# EAGLE board Titan_6L_EoB_v1p5 (EAGLE 9.6.2), part 1 of 2
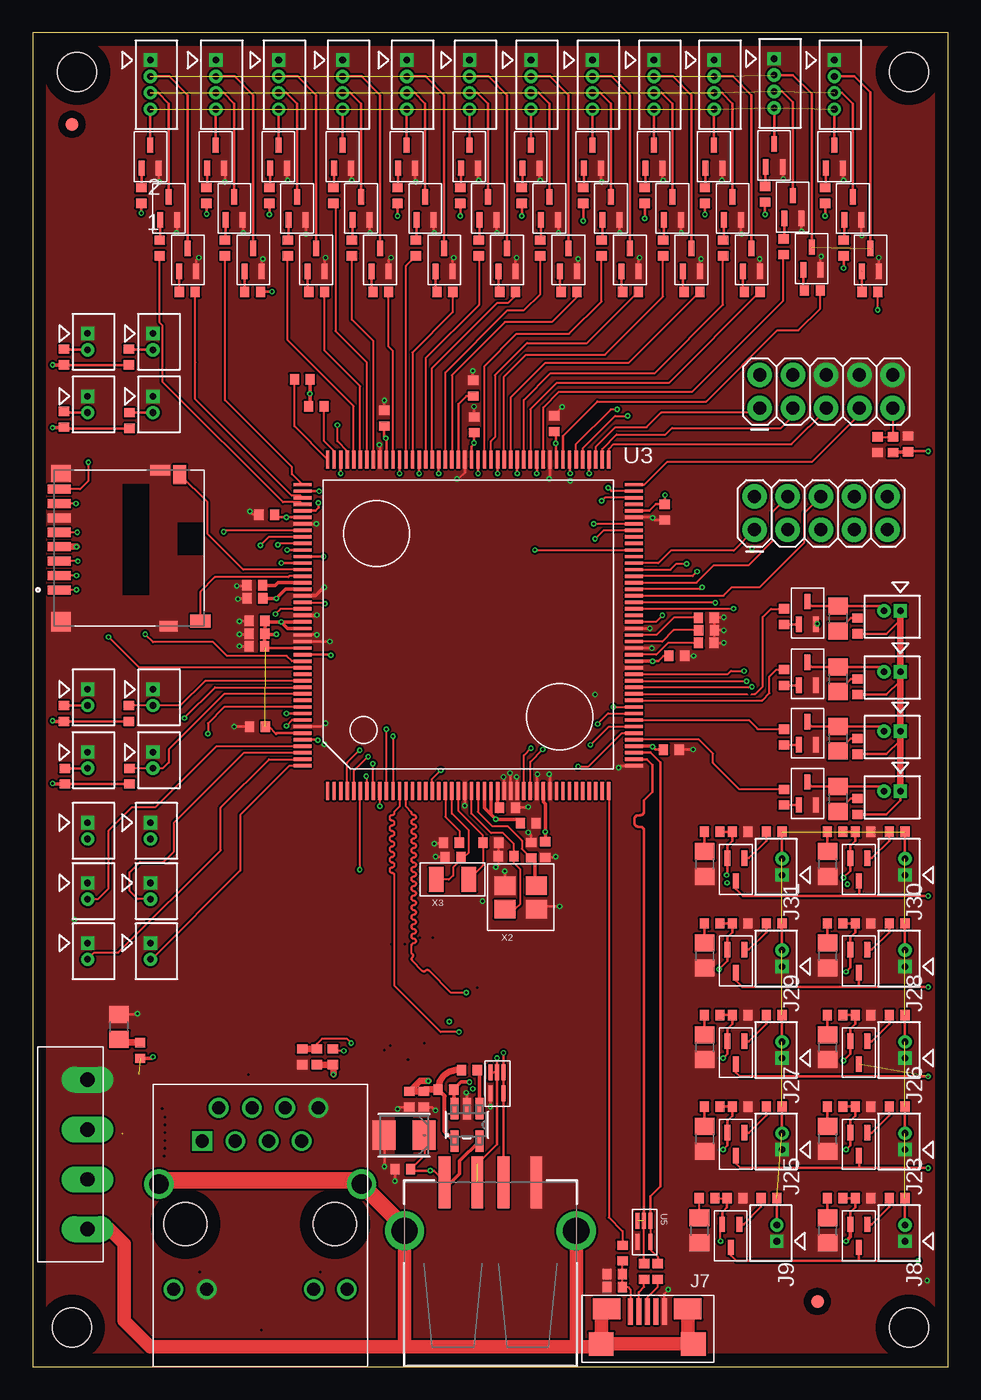
[diagram p0: board, top side]
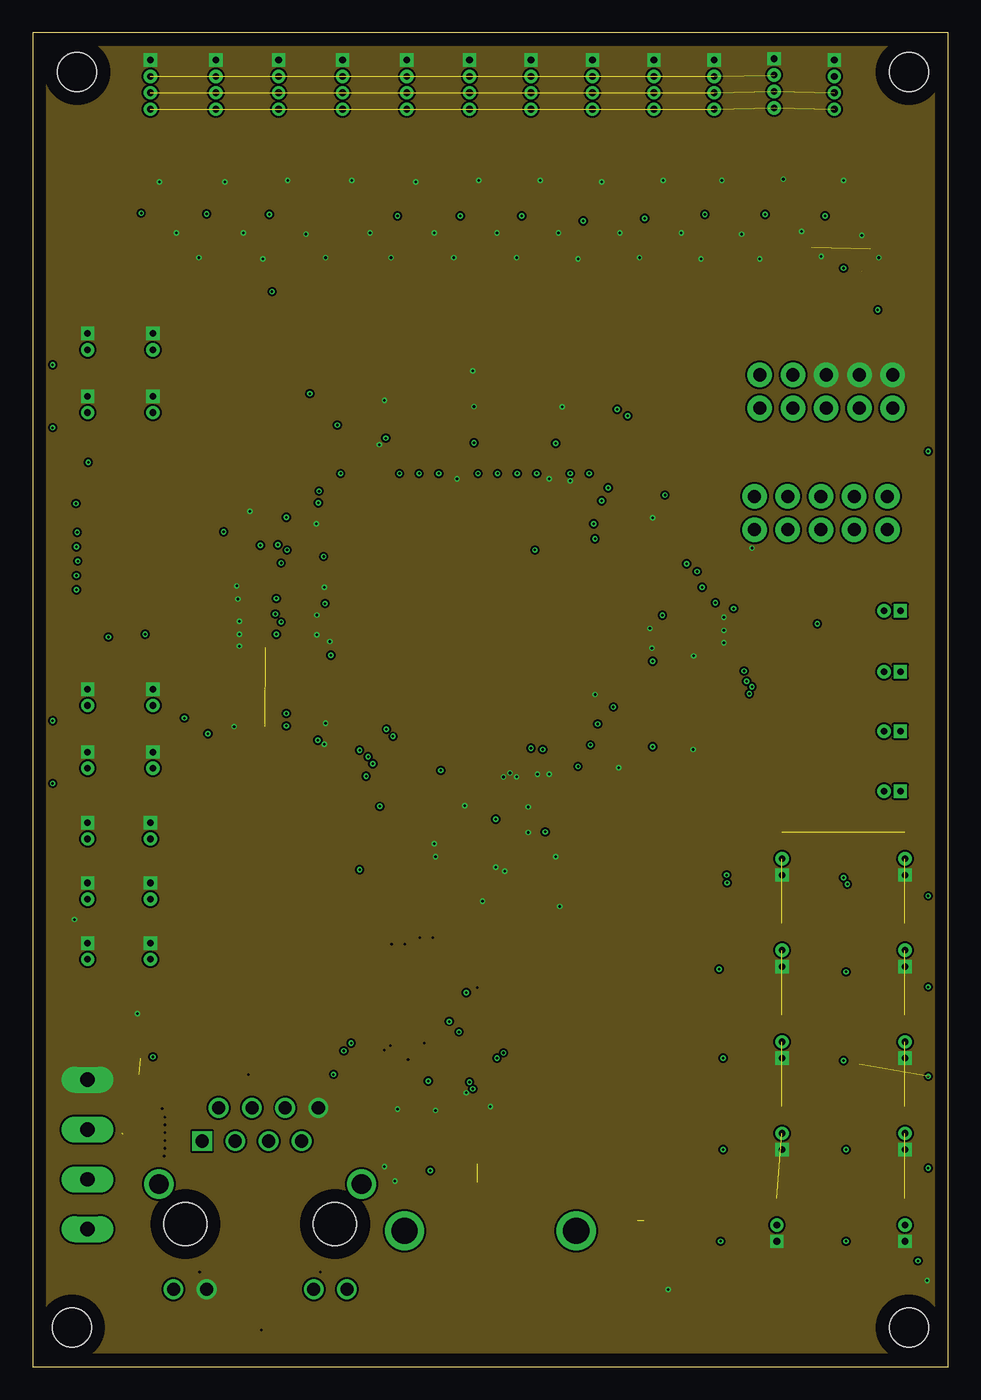
[diagram p1: board, inner layer GND]
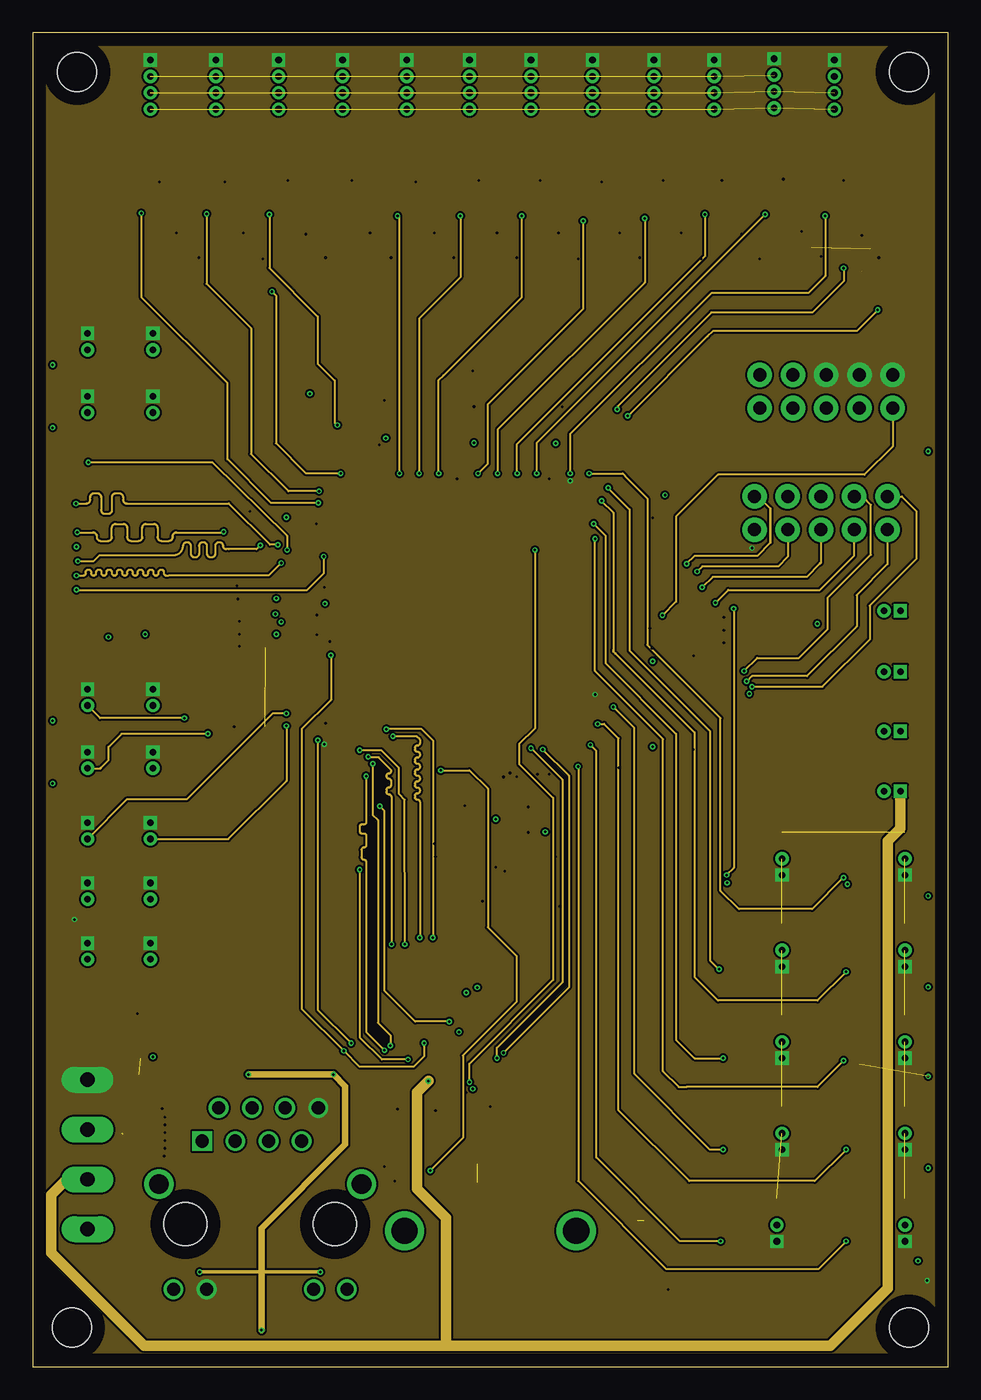
[diagram p2: board, inner layer Route3]
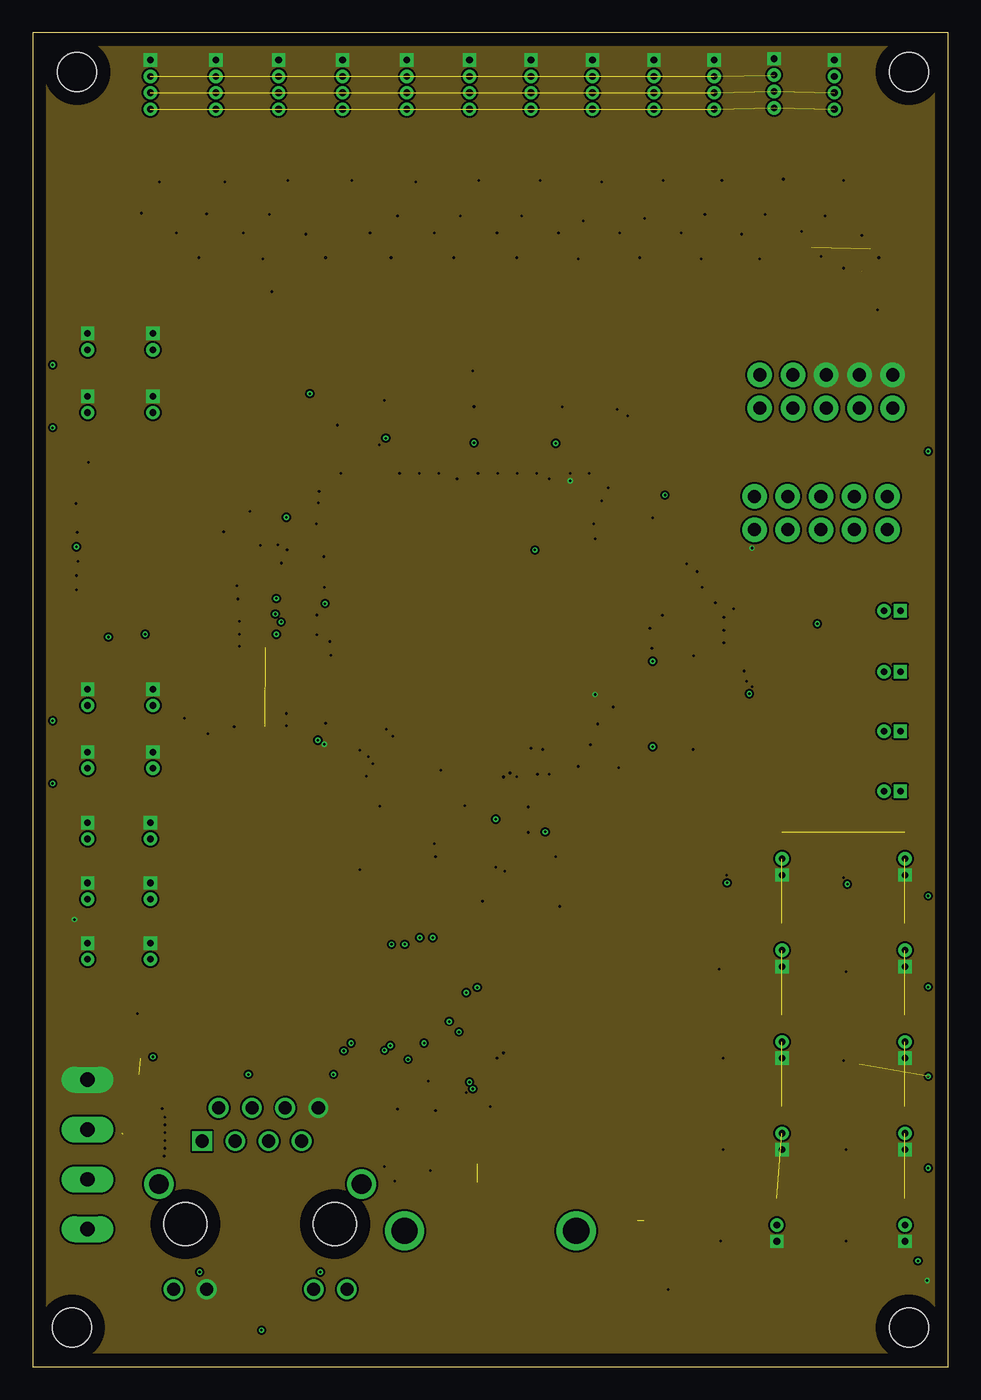
[diagram p3: board, inner layer GND14]
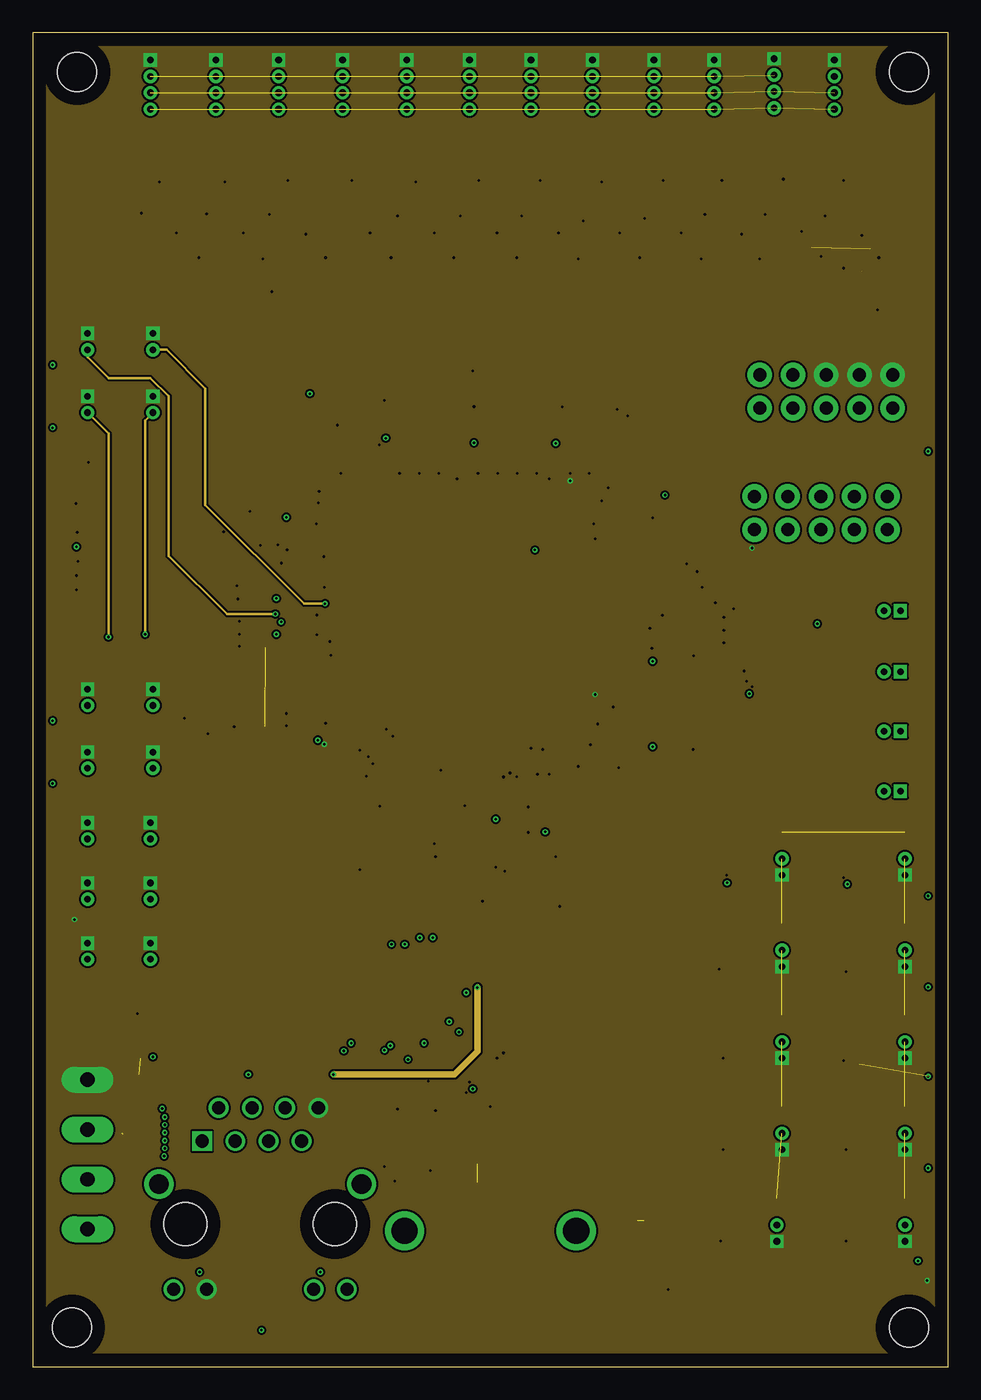
[diagram p4: board, inner layer Route15]
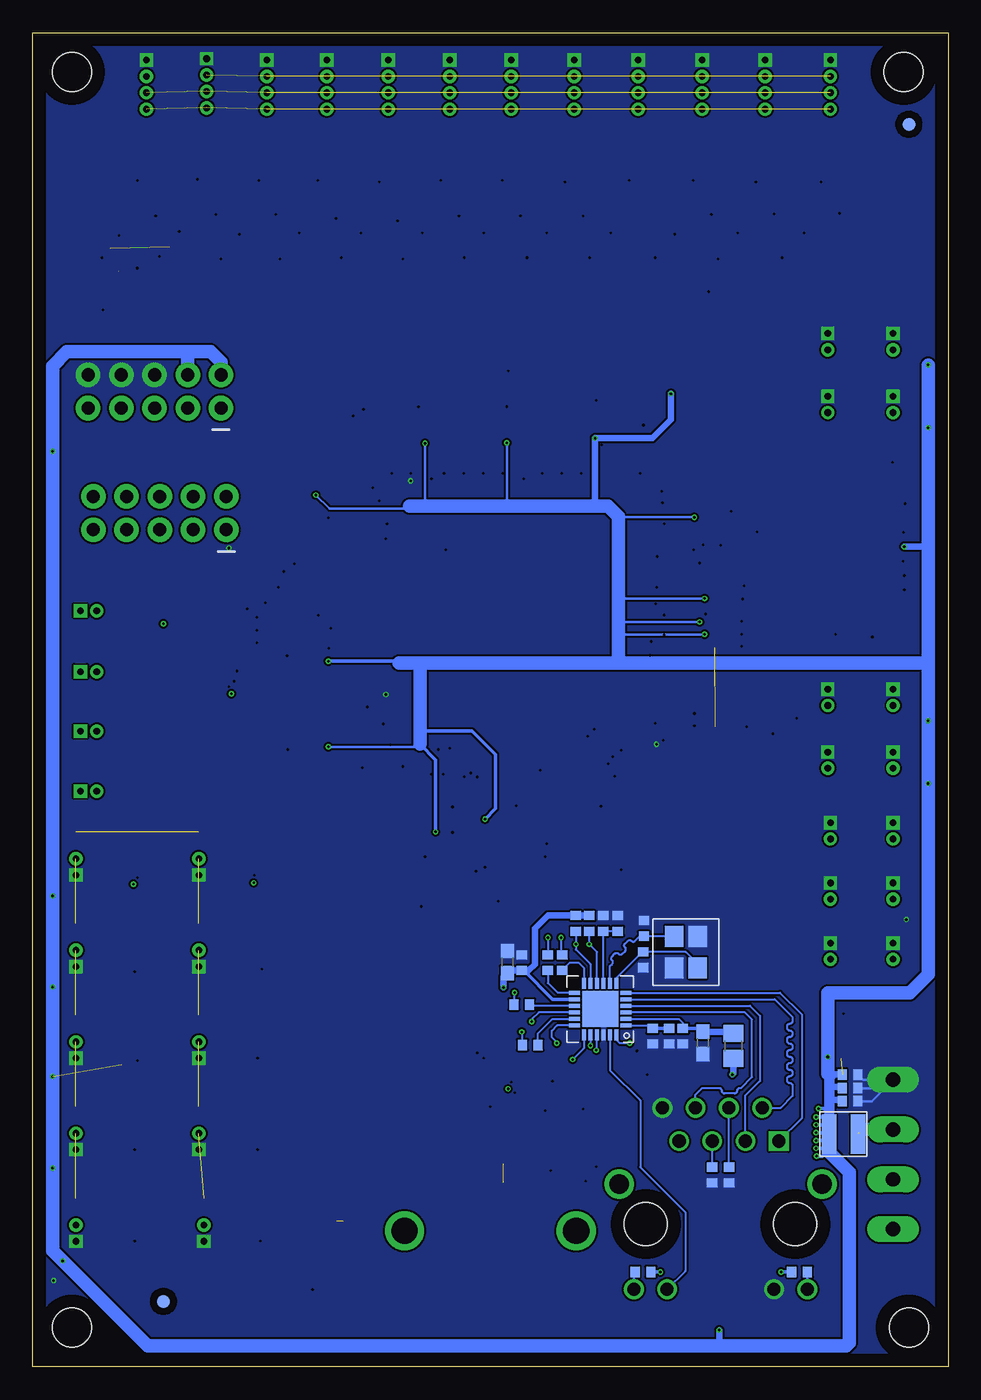
[diagram p5: board, bottom side, seen from below]

Size 70 x 102 mm. Coordinates in mm from the lower left corner, seen from the top.
Outline: 0,0 70,0 70,102 0,102 0,0
Copper layers ([3:[2:[15:1+2*3+14*15+16:2]:15]]): Top 0.0348mm / dielectric 0.1mm / GND 0.0348mm / dielectric 0.546mm / Route3 0.0348mm / dielectric 0.1mm / GND14 0.0348mm / dielectric 0.546mm / Route15 0.0348mm / dielectric 0.1mm / Bottom 0.0348mm
Design rules "default *": minimum track width 0.15mm, minimum drill 0.2mm, track to track 6mil, track to pad 6mil, pad to pad 6mil, via to via 6mil, smd to smd 6mil, copper to edge 40mil, drill to drill 6mil, minimum pad ring 10mil, minimum via ring 4mil, stop-mask expansion 4mil, vias tented up to drill 0mil, thermal gap 10mil
Holes 3 mm at 3.4,99 67,99 67,3 3,3

## Footprints (pad centres in the part's own frame; a part is rotated, then mirrored left to right if it is on the bottom)
FIDUCIAL_1MM = smd 1 x 1: 1 0,0
CAP_1210TJLJ_3P5X2P8_DIO-M = smd 1.753 x 2.261: 1 -1.537,0; 2 1.537,0
0402 = smd 0.8 x 0.7: P$1 0,0.6; P$2 0,-0.6
0603 = smd 1.1 x 1: 1 -0.85,0; 2 0.85,0
0805 = smd 1.3 x 1.5: 1 -0.95,0; 2 0.95,0
SD_CARD = smd 0.7 x 1.75: 1 3.2,-5.285; 2 2.1,-5.285; 3 1,-5.285; 4 -0.1,-5.285; 5 -1.2,-5.285; 6 -2.3,-5.285; 7 -3.4,-5.285; 8 -4.5,-5.285 | smd 1 x 1.55: 9 5.575,5.515 | smd 1.45 x 1: 10 -5.625,3.94 | smd 1.5 x 1.5: S1 5.65,-5.16 | smd 1.3 x 1.5: S2 -5.7,-5.16 | smd 0.8 x 1.4: S3 5.975,3.09 | smd 0.8 x 1.5: S4 -5.95,2.44
1X4_3.81MM_PITCH = drill 1.1 pad 2 long: P$1 0,0; P$2 3.81,0; P$3 7.62,0; P$4 11.43,0
2X5 = drill 1 pad 1.88: 1 0,0; 2 0,2.54; 3 2.54,0; 4 2.54,2.54; 5 5.08,0; 6 5.08,2.54; 7 7.62,0; 8 7.62,2.54; 9 10.16,0; 10 10.16,2.54
CON_530470210_MOL = drill 0.508 pad 0.838 square: 1 0,0 | drill 0.508 pad 0.838: 2 -1.245,0
USB_A_SMT = smd 4 x 0.9: D+ 6.7,-1; D- 6.7,1; GND 6.7,-3.5; VBUS 6.7,3.5 | drill 2: SHLD1 3,-6.566; SHLD2 3,6.566
USB_MICRO-B = smd 0.4 x 2: P$1 -1.3,2.475; P$2 -0.65,2.475; P$3 0,2.475; P$4 0.65,2.475; P$5 1.3,2.475 | smd 2.1 x 1.6: P$6 -3.1,2.675; P$7 3.1,2.675 | smd 1.9 x 1.8: P$8 -3.525,0; P$9 3.525,0
CON_530470410_MOL = drill 0.508 pad 0.838 square: 1 0,0 | drill 0.508 pad 0.838: 2 -1.245,0; 3 -2.489,0; 4 -3.759,0
1008 = smd 3 x 1.1: 1 0,1.1; 2 0,-1.1
SOT-23-5 = smd 1.626 x 0.61: 1 -1.245,0.95; 2 -1.245,0; 3 -1.245,-0.95; 4 1.245,-0.95; 5 1.245,0.95
LQFP176_24X24 = smd 1.372 x 0.254: 1 -12.675,10.75; 2 -12.675,10.25; 3 -12.675,9.75; 4 -12.675,9.25; 5 -12.675,8.75; 6 -12.675,8.25; 7 -12.675,7.75; 8 -12.675,7.25; 9 -12.675,6.75; 10 -12.675,6.25; 11 -12.675,5.75; 12 -12.675,5.25; 13 -12.675,4.75; 14 -12.675,4.25; 15 -12.675,3.75; 16 -12.675,3.25; 17 -12.675,2.75; 18 -12.675,2.25; 19 -12.675,1.75; 20 -12.675,1.25; 21 -12.675,0.75; 22 -12.675,0.25; 23 -12.675,-0.25; 24 -12.675,-0.75; 25 -12.675,-1.25; 26 -12.675,-1.75; 27 -12.675,-2.25; 28 -12.675,-2.75; 29 -12.675,-3.25; 30 -12.675,-3.75; 31 -12.675,-4.25; 32 -12.675,-4.75; 33 -12.675,-5.25; 34 -12.675,-5.75; 35 -12.675,-6.25; 36 -12.675,-6.75; 37 -12.675,-7.25; 38 -12.675,-7.75; 39 -12.675,-8.25; 40 -12.675,-8.75; 41 -12.675,-9.25; 42 -12.675,-9.75; 43 -12.675,-10.25; 44 -12.675,-10.75; 89 12.675,-10.75; 90 12.675,-10.25; 91 12.675,-9.75; 92 12.675,-9.25; 93 12.675,-8.75; 94 12.675,-8.25; 95 12.675,-7.75; 96 12.675,-7.25; 97 12.675,-6.75; 98 12.675,-6.25; 99 12.675,-5.75; 100 12.675,-5.25; 101 12.675,-4.75; 102 12.675,-4.25; 103 12.675,-3.75; 104 12.675,-3.25; 105 12.675,-2.75; 106 12.675,-2.25; 107 12.675,-1.75; 108 12.675,-1.25; 109 12.675,-0.75; 110 12.675,-0.25; 111 12.675,0.25; 112 12.675,0.75; 113 12.675,1.25; 114 12.675,1.75; 115 12.675,2.25; 116 12.675,2.75; 117 12.675,3.25; 118 12.675,3.75; 119 12.675,4.25; 120 12.675,4.75; 121 12.675,5.25; 122 12.675,5.75; 123 12.675,6.25; 124 12.675,6.75; 125 12.675,7.25; 126 12.675,7.75; 127 12.675,8.25; 128 12.675,8.75; 129 12.675,9.25; 130 12.675,9.75; 131 12.675,10.25; 132 12.675,10.75 | smd 0.254 x 1.372: 45 -10.75,-12.675; 46 -10.25,-12.675; 47 -9.75,-12.675; 48 -9.25,-12.675; 49 -8.75,-12.675; 50 -8.25,-12.675; 51 -7.75,-12.675; 52 -7.25,-12.675; 53 -6.75,-12.675; 54 -6.25,-12.675; 55 -5.75,-12.675; 56 -5.25,-12.675; 57 -4.75,-12.675; 58 -4.25,-12.675; 59 -3.75,-12.675; 60 -3.25,-12.675; 61 -2.75,-12.675; 62 -2.25,-12.675; 63 -1.75,-12.675; 64 -1.25,-12.675; 65 -0.75,-12.675; 66 -0.25,-12.675; 67 0.25,-12.675; 68 0.75,-12.675; 69 1.25,-12.675; 70 1.75,-12.675; 71 2.25,-12.675; 72 2.75,-12.675; 73 3.25,-12.675; 74 3.75,-12.675; 75 4.25,-12.675; 76 4.75,-12.675; 77 5.25,-12.675; 78 5.75,-12.675; 79 6.25,-12.675; 80 6.75,-12.675; 81 7.25,-12.675; 82 7.75,-12.675; 83 8.25,-12.675; 84 8.75,-12.675; 85 9.25,-12.675; 86 9.75,-12.675; 87 10.25,-12.675; 88 10.75,-12.675; 133 10.75,12.675; 134 10.25,12.675; 135 9.75,12.675; 136 9.25,12.675; 137 8.75,12.675; 138 8.25,12.675; 139 7.75,12.675; 140 7.25,12.675; 141 6.75,12.675; 142 6.25,12.675; 143 5.75,12.675; 144 5.25,12.675; 145 4.75,12.675; 146 4.25,12.675; 147 3.75,12.675; 148 3.25,12.675; 149 2.75,12.675; 150 2.25,12.675; 151 1.75,12.675; 152 1.25,12.675; 153 0.75,12.675; 154 0.25,12.675; 155 -0.25,12.675; 156 -0.75,12.675; 157 -1.25,12.675; 158 -1.75,12.675; 159 -2.25,12.675; 160 -2.75,12.675; 161 -3.25,12.675; 162 -3.75,12.675; 163 -4.25,12.675; 164 -4.75,12.675; 165 -5.25,12.675; 166 -5.75,12.675; 167 -6.25,12.675; 168 -6.75,12.675; 169 -7.25,12.675; 170 -7.75,12.675; 171 -8.25,12.675; 172 -8.75,12.675; 173 -9.25,12.675; 174 -9.75,12.675; 175 -10.25,12.675; 176 -10.75,12.675
DRL5 = smd 1.219 x 0.305: 1 -0.8,0.5; 2 -0.8,0; 3 -0.8,-0.5; 4 0.8,-0.5; 5 0.8,0.5
QFN-24-M = smd 0.864 x 0.305: 1 -1.968,1.25; 2 -1.968,0.75; 3 -1.968,0.25; 4 -1.968,-0.25; 5 -1.968,-0.75; 6 -1.968,-1.25; 13 1.968,-1.25; 14 1.968,-0.75; 15 1.968,-0.25; 16 1.968,0.25; 17 1.968,0.75; 18 1.968,1.25 | smd 0.305 x 0.864: 7 -1.25,-1.968; 8 -0.75,-1.968; 9 -0.25,-1.968; 10 0.25,-1.968; 11 0.75,-1.968; 12 1.25,-1.968; 19 1.25,1.968; 20 0.75,1.968; 21 0.25,1.968; 22 -0.25,1.968; 23 -0.75,1.968; 24 -1.25,1.968 | smd 2.743 x 2.743: 25 0,0
SOT323 = smd 0.457 x 1.168: 1 -0.65,-0.876; 2 0.65,-0.876; 3 0,0.876
RJ45_TH_ELEC = drill 1 square: 1 -4.45,-2.54 | drill 1: 2 -3.18,0; 3 -1.91,-2.54; 4 -0.635,0; 5 0.635,-2.54; 6 1.91,0; 7 3.17,-2.54; 8 4.445,0; 9 -6.63,-13.88; 10 -4.09,-13.88; 11 4.09,-13.88; 12 6.63,-13.88 | drill 1.5: 13 -7.75,-5.84; 14 7.75,-5.84 | hole 3.299: 5.715,-8.89; -5.715,-8.89
SMD_3225 = smd 1.6 x 1.4: 1 -1.2,-0.9; 2 1.2,-0.9; 3 1.2,0.9; 4 -1.2,0.9
SMD_X_2_PADS = smd 1.9 x 1.1: P$1 0,1.25; P$2 0,-1.25

## Placement (x,y rotation side)
AFID1  FIDUCIAL_1MM  [FIDUCIAL_1MM]  60,5 0 top
AFID2  FIDUCIAL_1MM  [FIDUCIAL_1MM]  3,95 0 top
AFID4  FIDUCIAL_1MM  [FIDUCIAL_1MM]  60,5 0 bottom
AFID5  FIDUCIAL_1MM  [FIDUCIAL_1MM]  3,95 0 bottom
C1  TLJT107M010R0900CAP_1210TJLJ_3P5X2P8_DIO-M  [CAP_1210TJLJ_3P5X2P8_DIO-M]  28.4,17.7 180 top
C4  0.1uF  [0402]  7.5,22.35 90 bottom
C5  10uF  [0402]  7.5,21.3 90 bottom
C6  0.1uF  [0402]  49.25,54.35 90 top
C7  0.1uF  [0402]  7.5,20.3 90 bottom
C15  0.1uF  [0402]  16.76,14.67 0 bottom
C16  10uF  [0402]  64.62,70.5 0 top
C17  18pF  [0402]  36.2,39.03 270 top
C18  18pF  [0402]  38.13,39.5 180 top
C19  0.1uF  [0402]  17,58.75 90 top
C20  0.1uF  [0402]  17.89,65.15 90 top
C21  1uF  [0402]  17.16,56.05 90 top
C22  0.1uF  [0402]  17.15,57.05 90 top
C23  10uF  [0402]  29.9,20.45 0 top
C24  0.1uF  [0402]  16.98,59.74 90 top
C25  0.1uF  [0402]  17.14,55.08 90 top
C26  0.1uF  [0402]  28.8,20.45 0 top
C27  0.1uF  [0402]  17.19,48.95 90 top
C28  1uF  [0402]  44.5,7.1 270 top
C29  0.1uF  [0402]  28.3,15.1 270 top
C30  0.1uF  [0402]  26.87,72.52 0 top
C31  0.1uF  [0402]  18.04,14.67 0 bottom
C32  12pF  [0402]  32.14,38.97 270 top
C33  0.1uF  [0402]  32.02,40.07 270 top
C34  0.1uF  [0402]  33.69,74.82 0 top
C35  0.1uF  [0402]  33.75,72.02 0 top
C36  0.1uF  [0402]  37.89,41.56 90 top
C37  12pF  [0402]  35.03,40.07 90 top
C38  0.1uF  [0402]  39.89,72.11 0 top
C39  0.1uF  [0402]  39.19,39.55 0 top
C40  0.1uF  [0402]  66.94,70.55 180 top
C41  1uF  [0402]  48.34,65.34 0 top
C42  0.1uF  [0402]  51.5,55.35 90 top
C43  0.1uF  [0402]  48.84,47.19 270 top
C44  24pF  [0402]  23.31,31.12 0 bottom
C45  24pF  [0402]  23.26,33.53 180 bottom
C46  22uF  [0603]  18.76,24.76 270 bottom
C47  0.1uF  [0402]  20.29,25.28 0 bottom
C48  2.2uF  [0402]  21.32,25.28 0 bottom
C49  .1uF  [0402]  22.6,25.28 0 bottom
C50  100pF  [0402]  26.36,33.9 180 bottom
C51  22uF  [0603]  33.7,30.95 90 bottom
C52  0.1uF  [0402]  32.6,30.9 180 bottom
FB2/2  [0805]  16.42,24.53 90 bottom
J1  SD_CARD  [SD_CARD]  7.31,62.6 270 top
J2  4-pos  [1X4_3.81MM_PITCH]  4.2,21.95 270 top
J3  10-pos  [2X5]  55.6,73.3 0 top
J4  [CON_530470210_MOL]  4.2,37 90 top
J5  [CON_530470210_MOL]  9,37 90 top
J6  USB-A  [USB_A_SMT]  35,7.4 90 top
J7  USB-B-Micro  [USB_MICRO-B]  47,1.75 0 top
J8  [CON_530470210_MOL]  66.7,9.6 270 top
J9  [CON_530470210_MOL]  56.9,9.6 270 top
J10  CONN_530470410_PICOBLADE_X_4  [CON_530470410_MOL]  9,99.91 90 top
J11  [CON_530470210_MOL]  66.35,44 0 top
J12  10-pos  [2X5]  55.2,64 0 top
J13  CONN_530470410_PICOBLADE_X_4  [CON_530470410_MOL]  14,99.91 90 top
J14  CONN_530470410_PICOBLADE_X_4  [CON_530470410_MOL]  18.8,99.91 90 top
J15  CONN_530470410_PICOBLADE_X_4  [CON_530470410_MOL]  23.7,99.91 90 top
J16  CONN_530470410_PICOBLADE_X_4  [CON_530470410_MOL]  28.6,99.91 90 top
J17  CONN_530470410_PICOBLADE_X_4  [CON_530470410_MOL]  47.5,99.91 90 top
J18  CONN_530470410_PICOBLADE_X_4  [CON_530470410_MOL]  33.4,99.91 90 top
J19  CONN_530470410_PICOBLADE_X_4  [CON_530470410_MOL]  61.3,99.91 90 top
J20  CONN_530470410_PICOBLADE_X_4  [CON_530470410_MOL]  38.1,99.91 90 top
J21  CONN_530470410_PICOBLADE_X_4  [CON_530470410_MOL]  52.1,99.91 90 top
J22  CONN_530470410_PICOBLADE_X_4  [CON_530470410_MOL]  42.8,99.91 90 top
J23  [CON_530470210_MOL]  66.7,16.6 270 top
J24  CONN_530470410_PICOBLADE_X_4  [CON_530470410_MOL]  56.7,100.01 90 top
J25  [CON_530470210_MOL]  57.3,16.6 270 top
J26  [CON_530470210_MOL]  66.7,23.6 270 top
J27  [CON_530470210_MOL]  57.3,23.6 270 top
J28  [CON_530470210_MOL]  66.7,30.6 270 top
J29  [CON_530470210_MOL]  57.3,30.6 270 top
J30  [CON_530470210_MOL]  66.7,37.6 270 top
J31  [CON_530470210_MOL]  57.3,37.6 270 top
J32  [CON_530470210_MOL]  66.35,48.6 0 top
J33  [CON_530470210_MOL]  66.35,53.15 0 top
J34  [CON_530470210_MOL]  66.35,57.8 0 top
J35  [CON_530470210_MOL]  4.2,41.6 90 top
J36  [CON_530470210_MOL]  4.2,32.4 90 top
J37  [CON_530470210_MOL]  9,32.4 90 top
J38  [CON_530470210_MOL]  9,41.6 90 top
L1  2.2uH  [1008]  8,17.8 270 bottom
LED1  Green  [0805]  6.6,26 90 top
LED3  Green  [0805]  60.78,10.44 270 top
LED4  Green  [0805]  50.98,10.44 270 top
LED5  Green  [0805]  61.58,43.42 90 top
LED6  Green  [0805]  60.78,17.44 270 top
LED7  Green  [0805]  51.38,17.44 270 top
LED8  Green  [0805]  60.78,24.44 270 top
LED9  Green  [0805]  51.38,24.44 270 top
LED10  Green  [0805]  60.78,31.44 270 top
LED11  Green  [0805]  51.38,31.44 270 top
LED12  Green  [0805]  60.78,38.44 270 top
LED13  Green  [0805]  51.38,38.44 270 top
LED14  Green  [0805]  61.58,48.02 90 top
LED15  Green  [0805]  61.58,52.57 90 top
LED16  Green  [0805]  61.58,57.22 90 top
R1  100K  [0402]  2.45,45.15 0 top
R2  100K  [0402]  7.4,45.15 0 top
R3  500R0  [0402]  57.45,43.55 0 top
R4  2.2K  [0402]  66.1,12.9 270 top
R5  470R0  [0402]  8.22,24.19 0 top
R6  470R0  [0402]  61.36,12.9 90 top
R7  10K0  [0402]  63.5,12.9 270 top
R8  2.2K  [0402]  56.3,12.9 270 top
R9  470R0  [0402]  51.56,12.9 90 top
R10  10K0  [0402]  53.7,12.9 270 top
R11  470R0  [0402]  63.06,42.84 0 top
R12  500R0  [0402]  57.45,48.15 0 top
R13  10K0  [0402]  65.77,70.5 0 top
R14  1K0  [0402]  20.62,75.5 270 top
R15  1K0  [0402]  21.68,73.43 90 top
R16  15K0  [0402]  45.1,8.7 0 top
R17  27R0  [0402]  46.75,7.3 0 top
R18  27R0  [0402]  47.8,7.3 0 top
R19  10K0  [0402]  31.6,21.2 270 top
R20  10K0  [0402]  33.4,22.7 270 top
R21  30K0  [0402]  44.5,6.1 90 top
R22  2K2  [0402]  36.31,42.75 270 top
R23  10K0  [0402]  51.52,56.32 270 top
R24  10K0  [0402]  51.51,57.28 270 top
R27  470R0  [0402]  63.06,47.44 0 top
R28  33R0  [0402]  8.3,89.55 180 top
R29  33R0  [0402]  9.71,85.53 180 top
R30  33R0  [0402]  11.82,82.2 270 top
R31  33R0  [0402]  13.3,89.55 180 top
R32  33R0  [0402]  14.71,85.53 180 top
R33  33R0  [0402]  16.82,82.2 270 top
R34  33R0  [0402]  18.1,89.55 180 top
R35  33R0  [0402]  19.51,85.53 180 top
R36  33R0  [0402]  21.72,82.2 270 top
R37  33R0  [0402]  23,89.55 180 top
R38  33R0  [0402]  24.41,85.53 180 top
R39  33R0  [0402]  26.62,82.2 270 top
R40  33R0  [0402]  27.9,89.55 180 top
R41  33R0  [0402]  29.31,85.53 180 top
R42  33R0  [0402]  31.52,82.2 270 top
R43  33R0  [0402]  46.8,89.55 180 top
R44  33R0  [0402]  48.21,85.53 180 top
R45  33R0  [0402]  50.42,82.2 270 top
R46  33R0  [0402]  32.7,89.55 180 top
R47  33R0  [0402]  34.11,85.53 180 top
R48  33R0  [0402]  36.32,82.2 270 top
R49  33R0  [0402]  60.6,89.55 180 top
R50  33R0  [0402]  62.01,85.53 180 top
R51  33R0  [0402]  64.02,82.2 270 top
R52  33R0  [0402]  37.4,89.55 180 top
R53  33R0  [0402]  38.81,85.53 180 top
R54  33R0  [0402]  41.02,82.2 270 top
R55  33R0  [0402]  51.4,89.55 180 top
R56  33R0  [0402]  52.81,85.53 180 top
R57  33R0  [0402]  55.02,82.2 270 top
R58  33R0  [0402]  42.1,89.55 180 top
R59  33R0  [0402]  43.51,85.53 180 top
R60  33R0  [0402]  45.72,82.2 270 top
R61  2.2K  [0402]  66.1,19.9 270 top
R62  470R0  [0402]  61.36,19.9 90 top
R63  10K0  [0402]  63.5,19.9 270 top
R64  33R0  [0402]  56,89.65 180 top
R65  33R0  [0402]  57.41,85.63 180 top
R66  33R0  [0402]  59.62,82.3 270 top
R67  2.2K  [0402]  56.7,19.9 270 top
R68  470R0  [0402]  51.96,19.9 90 top
R69  10K0  [0402]  54.1,19.9 270 top
R70  2.2K  [0402]  66.1,26.9 270 top
R71  470R0  [0402]  61.36,26.9 90 top
R72  10K0  [0402]  63.5,26.9 270 top
R73  2.2K  [0402]  56.7,26.9 270 top
R76  470R0  [0402]  51.96,26.9 90 top
R77  10K0  [0402]  54.1,26.9 270 top
R78  2.2K  [0402]  66.1,33.9 270 top
R79  470R0  [0402]  61.36,33.9 90 top
R80  10K0  [0402]  63.5,33.9 270 top
R81  2.2K  [0402]  56.7,33.9 270 top
R82  470R0  [0402]  51.96,33.9 90 top
R83  10K0  [0402]  54.1,33.9 270 top
R84  2.2K  [0402]  66.1,40.9 270 top
R85  470R0  [0402]  61.36,40.9 90 top
R86  10K0  [0402]  63.5,40.9 270 top
R88  2.2K  [0402]  56.7,40.9 270 top
R89  470R0  [0402]  51.96,40.9 90 top
R90  10K0  [0402]  54.1,40.9 270 top
R91  500R0  [0402]  57.45,52.7 0 top
R92  470R0  [0402]  63.06,51.99 0 top
R93  500R0  [0402]  57.45,57.35 0 top
R95  470R0  [0402]  63.06,56.64 0 top
R96  100K  [0402]  2.4,77.2 0 top
R97  100K  [0402]  7.35,77.2 0 top
R102  100K  [0402]  2.4,49.95 0 top
R103  100K  [0402]  7.35,49.95 0 top
R105  100K  [0402]  2.4,72.45 0 top
R106  100K  [0402]  7.4,72.35 0 top
R107  470  [0402]  23.33,7.25 90 bottom
R108  470  [0402]  11.37,7.25 270 bottom
R109  6k49  [0402]  25.26,33.9 0 bottom
R110  10K  [0402]  22.96,23.7 0 top
R111  10K  [0402]  21.74,23.7 0 top
R112  1K50  [0402]  28.46,33.9 180 bottom
R113  1K50  [0402]  27.44,33.9 180 bottom
R114  33  [0402]  29.5,30.9 0 bottom
R115  33  [0402]  30.6,30.9 0 bottom
R116  33  [0402]  31.95,24.6 90 bottom
R117  33  [0402]  32.6,27.7 90 bottom
TH01  [CON_530470210_MOL]  4.2,47 90 top
TH02  [CON_530470210_MOL]  9.2,47 90 top
TH03  [CON_530470210_MOL]  4.2,51.8 90 top
TH04  [CON_530470210_MOL]  9.2,51.8 90 top
TH05  [CON_530470210_MOL]  4.2,74.2 90 top
TH06  [CON_530470210_MOL]  9.2,74.2 90 top
TH07  [CON_530470210_MOL]  4.2,79 90 top
TH08  [CON_530470210_MOL]  9.2,79 90 top
U2  AP2151DWG-7  [SOT-23-5]  33.2,18.5 270 top
U3  S7G2LQFP176  [LQFP176_24X24]  33.3,56.7 90 top
U4  TVS-Diode  [DRL5]  35.5,21.7 270 top
U5  TVS-Diode  [DRL5]  46.75,10.35 270 top
U6  KSZ8081RNACAQFN-24-M  [QFN-24-M]  26.6,27.35 180 bottom
U7  NPN  [SOT323]  63.17,10.02 180 top
U8  NPN  [SOT323]  53.37,10.02 180 top
U9  NPN  [SOT323]  8.99,92.52 0 top
U10  NPN  [SOT323]  10.41,88.57 0 top
U11  NPN  [SOT323]  11.86,84.63 0 top
U12  NPN  [SOT323]  13.99,92.52 0 top
U13  NPN  [SOT323]  15.41,88.57 0 top
U14  NPN  [SOT323]  16.86,84.63 0 top
U15  NPN  [SOT323]  18.79,92.52 0 top
U16  NPN  [SOT323]  20.21,88.57 0 top
U17  NPN  [SOT323]  21.66,84.63 0 top
U18  NPN  [SOT323]  23.69,92.52 0 top
U19  NPN  [SOT323]  25.11,88.57 0 top
U20  NPN  [SOT323]  26.56,84.63 0 top
U21  NPN  [SOT323]  28.59,92.52 0 top
U22  NPN  [SOT323]  30.01,88.57 0 top
U23  NPN  [SOT323]  31.46,84.63 0 top
U24  NPN  [SOT323]  47.49,92.52 0 top
U25  NPN  [SOT323]  48.91,88.57 0 top
U26  NPN  [SOT323]  50.36,84.63 0 top
U27  NPN  [SOT323]  33.39,92.52 0 top
U28  NPN  [SOT323]  34.81,88.57 0 top
U29  NPN  [SOT323]  36.26,84.63 0 top
U30  NPN  [SOT323]  61.29,92.52 0 top
U31  NPN  [SOT323]  62.71,88.57 0 top
U32  NPN  [SOT323]  64.06,84.63 0 top
U33  NPN  [SOT323]  38.09,92.52 0 top
U34  NPN  [SOT323]  39.51,88.57 0 top
U35  NPN  [SOT323]  40.96,84.63 0 top
U36  NPN  [SOT323]  52.09,92.52 0 top
U37  NPN  [SOT323]  53.51,88.57 0 top
U38  NPN  [SOT323]  54.96,84.63 0 top
U39  NPN  [SOT323]  42.79,92.52 0 top
U40  NPN  [SOT323]  44.21,88.57 0 top
U41  NPN  [SOT323]  45.66,84.63 0 top
U42  NPN  [SOT323]  59.25,43.84 0 top
U43  NPN  [SOT323]  63.17,17.02 180 top
U44  NPN  [SOT323]  53.77,17.02 180 top
U45  NPN  [SOT323]  56.69,92.62 0 top
U46  NPN  [SOT323]  58.11,88.67 0 top
U47  NPN  [SOT323]  59.56,84.73 0 top
U48  NPN  [SOT323]  63.17,24.02 180 top
U49  NPN  [SOT323]  53.77,24.02 180 top
U50  NPN  [SOT323]  63.17,31.02 180 top
U51  NPN  [SOT323]  53.77,31.02 180 top
U52  NPN  [SOT323]  63.17,38.02 180 top
U53  NPN  [SOT323]  53.77,38.02 180 top
U54  NPN  [SOT323]  59.25,48.44 0 top
U55  NPN  [SOT323]  59.25,52.99 0 top
U56  NPN  [SOT323]  59.25,57.64 0 top
U$2  [RJ45_TH_ELEC]  17.4,19.8 0 top
U$3  [SMD_3225]  20.05,31.71 270 bottom
U$4  10uF  [0402]  20.61,23.7 0 top
X2  24MHz  [SMD_3225]  37.31,35.89 0 top
X3  32.768KHz  [SMD_X_2_PADS]  32.1,37.26 90 top

## Library data of the parts
AFID1 AFID2 AFID4 AFID5 C15 C31 C44-C52 FB2/2 R1-R4 R8 R12 R61 R67 R70 R73 R78 R81 R84 R88 R91 R93 R96 R97 R102 R103 R105-R117 U$2-U$4 = 3D_MIG_Controller
C1 = 3D_MIG_Controller; COPYRIGHT: Copyright (C) 2023 Ultra Librarian. All rights reserved.; DIGIKEY_PART_NUMBER_1: 478-9011-1-ND; DIGIKEY_PART_NUMBER_2: 478-9011-2-ND; DIGIKEY_PART_NUMBER_3: 478-9011-6-ND; MANUFACTURER_PART_NUMBER: TLJT107M010R0900; MFR_NAME: Diodes Inc
C4 C6 C7 C19 C20 C22 C24-C27 C29 C30 C33-C36 C38-C40 C42 C43 = 3D_MIG_Controller; PARTNO: CL05F104ZO5NNNC
C5 C16 C23 = 3D_MIG_Controller; PARTNO: CL05A106MP8NUB8
C17 C18 = 3D_MIG_Controller; PARTNO: UMK105CG180JV-F
C21 C28 C41 = 3D_MIG_Controller; PARTNO: CL05A105KO5NNNC
C32 C37 = 3D_MIG_Controller; PARTNO: CL05C120JB5NNNC
J1 = 3D_MIG_Controller; MF: Amphenol ICC; PARTNO: 114-00841-68; VID: Digikey; VP: 114-00841-68-1-ND; VURL: https://www.digikey.ae/product-detail/en/amphenol-icc-commercial-products/114-00841-68/114-00841-68-1-ND/2187101?utm_source=snapeda&utm_medium=aggregator&utm_campaign=symbol
J2 = 3D_MIG_Controller; PARTNO: 691322310004
J3 J12 = 3D_MIG_Controller; PARTNO: PH2RA-10-UA
J4 J5 J8 J9 J11 J23 J25-J38 TH01-TH08 = 3D_MIG_Controller; COPYRIGHT: Copyright (C) 2022 Ultra Librarian. All rights reserved.; MANUFACTURER_PART_NUMBER: 530470210; MFR_NAME: Molex Connector Corporation
J6 = 3D_MIG_Controller; NOZZLE: CN400; PARTNO: 87583-3010RPALF
J7 = 3D_MIG_Controller; PARTNO: 10118192-0002LF
J10 J13-J22 J24 = 3D_MIG_Controller; COPYRIGHT: Copyright (C) 2022 Ultra Librarian. All rights reserved.; MANUFACTURER_PART_NUMBER: 530470410; MFR_NAME: Molex Connector Corporation
L1 = 3D_MIG_Controller; PARTNO: LQM2HPN2R2MG0L
LED1 LED3-LED16 = 3D_MIG_Controller; PARTNO: LG R971-KN-1
R5 R6 R9 R11 R27 R62 R68 R71 R76 R79 R82 R85 R89 R92 R95 = 3D_MIG_Controller; PARTNO: RMCF0402JT470R
R7 R10 R13 R19 R20 R23 R24 R63 R69 R72 R77 R80 R83 R86 R90 = 3D_MIG_Controller; PARTNO: RMCF0402JT10K0
R14 R15 = 3D_MIG_Controller; PARTNO: CRG0402J1K0
R16 = 3D_MIG_Controller; PARTNO: RMCF0402JT15K0
R17 R18 = 3D_MIG_Controller; PARTNO: RMCF0402JT27R0
R21 = 3D_MIG_Controller; PARTNO: RC0402JR-0730KL
R22 = 3D_MIG_Controller; PARTNO: RMCF0402JT2K20
R28-R60 R64-R66 = 3D_MIG_Controller; PARTNO: RMCF0402JT33R0
U2 = 3D_MIG_Controller; PARTNO: AP2151WG-7
U3 = 3D_MIG_Controller; PARTNO: R7FS7G27H3A01CFC#AA0
U4 U5 = 3D_MIG_Controller; PARTNO: TPD2E2U06DRLR
U6 = 3D_MIG_Controller; MANUFACTURER_PART_NUMBER: KSZ8081RNACA; VENDOR: Micrel
U7-U56 = 3D_MIG_Controller; PARTNO: BC846BW_NPN
X2 = 3D_MIG_Controller; PARTNO: FA-238 24.0000MB-C3
X3 = 3D_MIG_Controller; PARTNO: ABS07-32.768KHZ-T

## Nets
C58: C15.P$1 U$2.4
C60: C31.P$1 U$2.5
CRS_DV: R117.P$2 U6.15
D+: J7.P$3 R18.P$2
D-: J7.P$2 R17.P$2
ESTOP: R89.P$2 R90.P$2 U3.69 U53.2
ETH_CLK: U3.9 U6.16
ETH_CRS_DV: R117.P$1 U3.13
ETH_IRQ14: R110.P$1 U3.159 U6.18
ETH_MDC: R112.P$1 U3.4 U6.11
ETH_MDIO: R113.P$1 U3.5 U6.10
ETH_RESET: R111.P$1 U3.172 U6.24 U$4.P$1
ETH_RX_ER: R116.P$1 U3.12
ETH_RXD0: R115.P$1 U3.10
ETH_RXD1: R114.P$1 U3.11
ETH_TXD0: U3.8 U6.20
ETH_TXD1: U3.7 U6.21
ETH_TXD_EN: U3.6 U6.19
GND: C1.2 C4.P$2 C5.P$2 C6.P$2 C7.P$2 C15.P$2 C16.P$2 C17.P$2 C18.P$2 C19.P$1 C20.P$1 C21.P$1 C22.P$1 C23.P$2 C24.P$1 C25.P$1 C26.P$2 C27.P$1 C28.P$2 C29.P$2 C30.P$1 C31.P$2 C32.P$2 C33.P$2 C34.P$1 C35.P$1 C36.P$2 C37.P$2 C38.P$1 C39.P$2 C40.P$2 C41.P$2 C42.P$2 C43.P$1 C44.P$2 C45.P$2 C46.2 C47.P$2 C48.P$2 C49.P$2 C50.P$2 C51.2 C52.P$2 J1.6 J1.S1 J1.S2 J1.S3 J1.S4 J2.P$1 J3.6 J3.8 J3.10 J4.1 J5.1 J6.GND J7.P$5 J8.1 J9.1 J10.1 J13.1 J14.1 J15.1 J16.1 J17.1 J18.1 J19.1 J20.1 J21.1 J22.1 J23.1 J24.1 J25.1 J26.1 J27.1 J28.1 J29.1 J30.1 J31.1 J35.1 J36.1 J37.1 J38.1 LED1.2 LED3.2 LED4.2 LED6.2 LED7.2 LED8.2 LED9.2 LED10.2 LED11.2 LED12.2 LED13.2 R7.P$1 R10.P$1 R21.P$1 R22.P$1 R23.P$1 R24.P$1 R63.P$1 R69.P$1 R72.P$1 R77.P$1 R80.P$1 R83.P$1 R86.P$1 R90.P$1 R109.P$1 TH01.1 TH02.1 TH03.1 TH04.1 TH05.1 TH06.1 TH07.1 TH08.1 U2.2 U3.22 U3.28 U3.29 U3.30 U3.33 U3.35 U3.45 U3.60 U3.63 U3.66 U3.83 U3.98 U3.111 U3.124 U3.139 U3.150 U3.153 U3.156 U3.157 U3.170 U4.4 U5.4 U6.22 U6.25 U9.2 U10.2 U11.2 U12.2 U13.2 U14.2 U15.2 U16.2 U17.2 U18.2 U19.2 U20.2 U21.2 U22.2 U23.2 U24.2 U25.2 U26.2 U27.2 U28.2 U29.2 U30.2 U31.2 U32.2 U33.2 U34.2 U35.2 U36.2 U37.2 U38.2 U39.2 U40.2 U41.2 U42.2 U45.2 U46.2 U47.2 U54.2 U55.2 U56.2 U$2.8 U$2.10 U$3.2 U$3.4 U$4.P$2 X2.2 X2.4
GNDS: J2.P$4 J6.SHLD1 J6.SHLD2 J7.P$6 J7.P$7 J7.P$8 J7.P$9 U$2.13 U$2.14
ID: J7.P$4
IIC_1_SCL: R14.P$2 U3.132
IIC_1_SDA: R15.P$2 U3.131
LED1/SPEED: U6.23 U$2.11
LS_01: R6.P$2 R7.P$2 U3.50 U7.2
LS_02: R9.P$2 R10.P$2 U3.51 U8.2
LS_03: R62.P$2 R63.P$2 U3.53 U43.2
LS_04: R68.P$2 R69.P$2 U3.54 U44.2
LS_05: R71.P$2 R72.P$2 U3.81 U48.2
LS_06: R76.P$2 R77.P$2 U3.82 U49.2
LS_07: R79.P$2 R80.P$2 U3.86 U50.2
LS_08: R82.P$2 R83.P$2 U3.87 U51.2
LS_09: R85.P$2 R86.P$2 U3.92 U52.2
LS_RET: J8.2 J9.2 J23.2 J25.2 J26.2 J27.2 J28.2 J29.2 J30.2 J31.2 R4.P$1 R8.P$1 R61.P$1 R67.P$1 R70.P$1 R73.P$1 R78.P$1 R81.P$1 R84.P$1 R88.P$1
M1_DIR: R29.P$1 U3.136
M1_ENABLE: R30.P$1 U3.135
M1_STEP: R28.P$1 U3.137
M2_DIR: R32.P$1 U3.133
M2_ENABLE: R33.P$1 U3.130
M2_STEP: R31.P$1 U3.134
M3_DIR: R35.P$1 U3.128
M3_ENABLE: R36.P$1 U3.127
M3_STEP: R34.P$1 U3.129
M4_DIR: R38.P$1 U3.125
M4_ENABLE: R39.P$1 U3.122
M4_STEP: R37.P$1 U3.126
M5_DIR: R41.P$1 U3.120
M5_ENABLE: R42.P$1 U3.119
M5_STEP: R40.P$1 U3.121
M6_DIR: R47.P$1 U3.117
M6_ENABLE: R48.P$1 U3.116
M6_STEP: R46.P$1 U3.118
M7_DIR: R53.P$1 U3.114
M7_ENABLE: R54.P$1 U3.113
M7_STEP: R52.P$1 U3.115
M8_DIR: R59.P$1 U3.108
M8_ENABLE: R60.P$1 U3.107
M8_STEP: R58.P$1 U3.109
M9_DIR: R44.P$1 U3.105
M9_ENABLE: R45.P$1 U3.104
M9_STEP: R43.P$1 U3.106
M10_DIR: R56.P$1 U3.102
M10_ENABLE: R57.P$1 U3.101
M10_STEP: R55.P$1 U3.103
M11_DIR: R65.P$1 U3.99
M11_ENABLE: R66.P$1 U3.96
M11_STEP: R64.P$1 U3.100
M12_DIR: R50.P$1 U3.94
M12_ENABLE: R51.P$1 U3.93
M12_STEP: R49.P$1 U3.95
MO_DIR: J10.3 J13.3 J14.3 J15.3 J16.3 J17.3 J18.3 J19.3 J20.3 J21.3 J22.3 J24.3 U10.3 U13.3 U16.3 U19.3 U22.3 U25.3 U28.3 U31.3 U34.3 U37.3 U40.3 U46.3
MO_ENABLE: J10.2 J13.2 J14.2 J15.2 J16.2 J17.2 J18.2 J19.2 J20.2 J21.2 J22.2 J24.2 U11.3 U14.3 U17.3 U20.3 U23.3 U26.3 U29.3 U32.3 U35.3 U38.3 U41.3 U47.3
MO_STEP: J10.4 J13.4 J14.4 J15.4 J16.4 J17.4 J18.4 J19.4 J20.4 J21.4 J22.4 J24.4 U9.3 U12.3 U15.3 U18.3 U21.3 U24.3 U27.3 U30.3 U33.3 U36.3 U39.3 U45.3
N$1: C24.P$2 U3.148
N$3: LED1.1 R5.P$1
N$4: C33.P$1 U3.19
N$5: C42.P$1 U3.62
N$6: R23.P$2 U3.64
N$7: R24.P$2 U3.65
N$8: R22.P$2 U3.27
N$10: R4.P$2 U7.1
N$11: LED3.1 R6.P$1
N$12: R29.P$2 U10.1
N$13: R30.P$2 U11.1
N$14: R28.P$2 U9.1
N$15: R32.P$2 U13.1
N$16: R33.P$2 U14.1
N$17: R31.P$2 U12.1
N$18: R35.P$2 U16.1
N$19: R36.P$2 U17.1
N$20: R34.P$2 U15.1
N$21: R38.P$2 U19.1
N$22: R39.P$2 U20.1
N$23: R37.P$2 U18.1
N$24: R41.P$2 U22.1
N$25: R42.P$2 U23.1
N$26: R40.P$2 U21.1
N$27: R44.P$2 U25.1
N$28: R45.P$2 U26.1
N$29: R43.P$2 U24.1
N$30: R47.P$2 U28.1
N$31: R48.P$2 U29.1
N$32: R46.P$2 U27.1
N$33: R50.P$2 U31.1
N$34: R51.P$2 U32.1
N$35: R49.P$2 U30.1
N$36: R53.P$2 U34.1
N$37: R54.P$2 U35.1
N$38: R52.P$2 U33.1
N$39: R56.P$2 U37.1
N$40: R57.P$2 U38.1
N$41: R55.P$2 U36.1
N$42: R59.P$2 U40.1
N$43: R60.P$2 U41.1
N$44: R58.P$2 U39.1
N$45: R8.P$2 U8.1
N$46: LED4.1 R9.P$1
N$48: R65.P$2 U46.1
N$49: R66.P$2 U47.1
N$50: R64.P$2 U45.1
N$51: R3.P$2 U42.1
N$52: R61.P$2 U43.1
N$53: LED6.1 R62.P$1
N$54: R67.P$2 U44.1
N$55: LED7.1 R68.P$1
N$56: R70.P$2 U48.1
N$57: LED8.1 R71.P$1
N$58: R73.P$2 U49.1
N$59: LED9.1 R76.P$1
N$60: R78.P$2 U50.1
N$61: LED10.1 R79.P$1
N$62: R81.P$2 U51.1
N$63: LED11.1 R82.P$1
N$64: R84.P$2 U52.1
N$65: LED12.1 R85.P$1
N$66: R88.P$2 U53.1
N$67: LED13.1 R89.P$1
N$69: J11.2 LED5.2 U42.3
N$70: LED5.1 R11.P$1
N$71: R12.P$2 U54.1
N$72: J32.2 LED14.2 U54.3
N$73: LED14.1 R27.P$1
N$74: R91.P$2 U55.1
N$75: J33.2 LED15.2 U55.3
N$76: LED15.1 R92.P$1
N$77: R93.P$2 U56.1
N$78: J34.2 LED16.2 U56.3
N$79: LED16.1 R95.P$1
NC: U$2.7
P0_00: J38.2 U3.169
P0_01: J35.2 U3.168
P0_02_TH_01: R1.P$1 TH01.2 U3.167
P0_03: U3.166
P0_04_TH_02: R2.P$1 TH02.2 U3.165
P0_05_TH_03: R102.P$1 TH03.2 U3.164
P0_06_TH_04: R103.P$1 TH04.2 U3.163
P0_07: U3.162
P0_08_TH_05: R105.P$1 TH05.2 U3.161
P0_09_TH_06: R106.P$1 TH06.2 U3.160
P0_14_TH_07: R96.P$1 TH07.2 U3.152
P0_15_TH_08: R97.P$1 TH08.2 U3.151
P2_01: U3.68
P3_03: U3.85
P3_06: U3.80
P3_07: U3.79
P3_09: U3.77
P3_10: J12.1 U3.76
P3_11: J12.2 U3.75
P3_12: J12.3 U3.74
P3_15: J12.10 U3.57
P4_00: U3.1
P4_01: U3.2
P4_02: U3.3
P4_08: U3.43
P4_09: U3.42
P4_10: U3.41
P4_11: U3.40
P4_12: U3.39
P4_13: U3.38
P4_14: U3.37
P4_15: U3.36
P5_11: J37.2 U3.176
P5_12: J36.2 U3.175
P5_13: J5.2 U3.174
P7_06: U3.14
P7_07: U3.15
P8_05: J4.2 U3.173
P9_00: J12.9 U3.58
P9_01: J12.8 U3.59
P9_05: J12.4 U3.73
P9_06: J12.5 U3.72
P9_07: J12.6 U3.71
P9_08: J12.7 U3.70
PB_00: U3.16
R51: R107.P$1 U$2.12
R52: R108.P$1 U$2.9
RELAY_01: R93.P$1 U3.56
RELAY_02: R91.P$1 U3.55
RELAY_03: R12.P$1 U3.52
RELAY_04: R3.P$1 U3.49
RESET: C16.P$1 J3.9 R13.P$1 U3.67
REXT: C50.P$1 R109.P$2 U6.9
RXD0: R115.P$2 U6.13
RXD1: R114.P$2 U6.12
RXER: R116.P$2 U6.17
RXM: U6.3 U$2.6
RXP: U6.4 U$2.3
SD1_CD: J1.10 U3.146
SD1_CLK: J1.5 U3.140
SD1_CMD: J1.3 U3.141
SD1_DAT0: J1.7 U3.142
SD1_DAT1: J1.8 U3.143
SD1_DAT2: J1.1 U3.144
SD1_DAT3: J1.2 U3.145
SD1_WP: J1.9 U3.147
TCK: J3.7 U3.88
TDI: J3.1 U3.91
TDO: J3.3 U3.90
TMS: J3.5 U3.89
TXM: U6.5 U$2.2
TXP: U6.6 U$2.1
USB_DN [USB_DIFF_PAIR]: R17.P$1 U3.46 U5.2 U5.3
USB_DP [USB_DIFF_PAIR]: R18.P$1 U3.47 U5.1 U5.5
USB_VBUS_B: R16.P$1 U3.44
USBHS_DN: J6.D- U3.31 U4.2 U4.3
USBHS_DP: J6.D+ U3.32 U4.1 U4.5
USBHS_FAULT: R19.P$1 U2.3 U3.78
USBHS_VBUS: C1.1 C29.P$1 J6.VBUS U2.5 U3.17
USBHS_VBUSEN: R20.P$1 U2.1
VBUS: C28.P$1 J7.P$1 R16.P$2 R21.P$2
VCL_F(FLASH): C34.P$2 U3.112
VDD: C4.P$1 C5.P$1 C6.P$1 C7.P$1 C19.P$2 C20.P$2 C21.P$2 C22.P$2 C25.P$2 C27.P$2 C30.P$2 C35.P$2 C36.P$1 C38.P$2 C39.P$1 C40.P$1 C41.P$1 C43.P$2 C51.1 C52.P$1 FB2/2.1 J1.4 J3.2 J3.4 L1.2 R1.P$2 R2.P$2 R5.P$2 R13.P$2 R14.P$1 R15.P$1 R96.P$2 R97.P$2 R102.P$2 R103.P$2 R105.P$2 R106.P$2 R107.P$2 R108.P$2 R110.P$2 R111.P$2 R112.P$2 R113.P$2 U3.25 U3.26 U3.34 U3.48 U3.61 U3.84 U3.97 U3.110 U3.123 U3.138 U3.149 U3.154 U3.155 U3.158 U3.171 U6.14 U7.3 U8.3 U43.3 U44.3 U48.3 U49.3 U50.3 U51.3 U52.3 U53.3
VDD5: C23.P$1 C26.P$1 J2.P$3 J11.1 J32.1 J33.1 J34.1 R11.P$2 R19.P$2 R20.P$2 R27.P$2 R92.P$2 R95.P$2 U2.4
VDD_1.2: C48.P$1 C49.P$1 U6.1
VDD_ENET1: C46.1 C47.P$1 FB2/2.2 U6.2
VDDIN: J2.P$2 L1.1
XCIN: C32.P$1 U3.20 X3.P$1
XCOUT: C37.P$1 U3.21 X3.P$2
XII: C45.P$1 U6.8 U$3.1
XOO: C44.P$1 U6.7 U$3.3
XTAL1: C17.P$1 U3.23 X2.1
XTAL2: C18.P$1 U3.24 X2.3